# EAGLE board avoccado-avr-pcb-kane-a1-panel (EAGLE 7.2.0)
Avoccado-avr controller
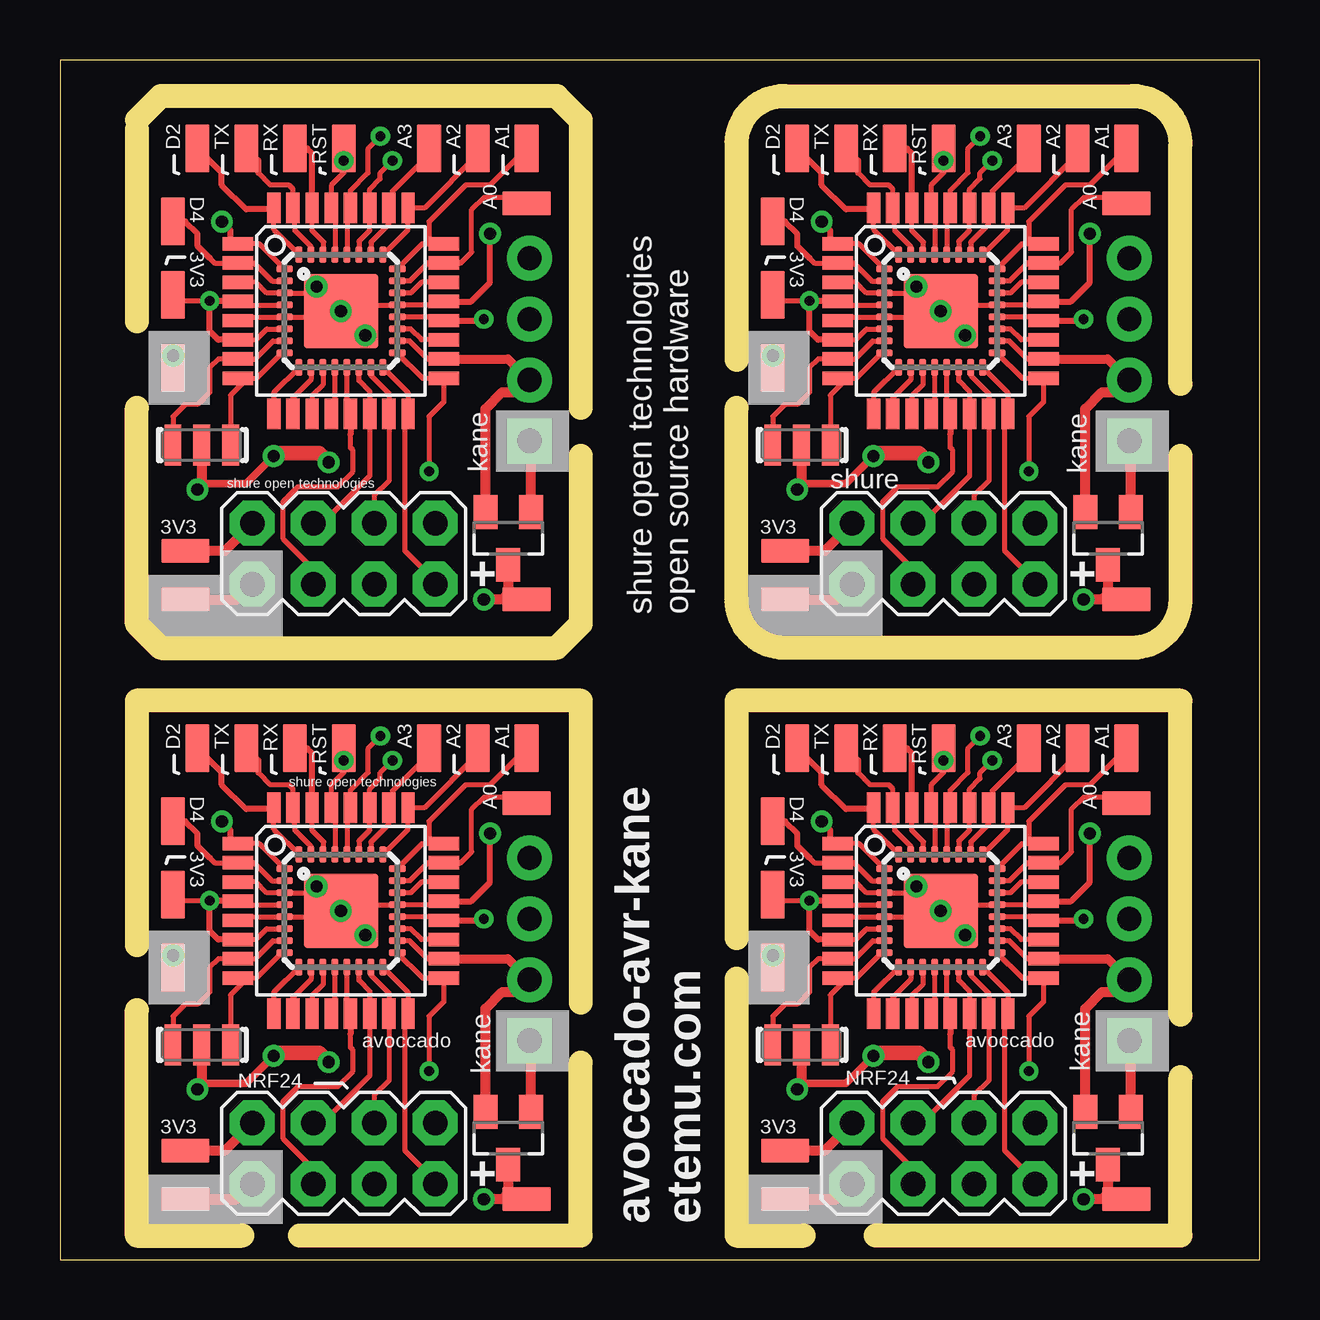
[diagram p0: board, top side]
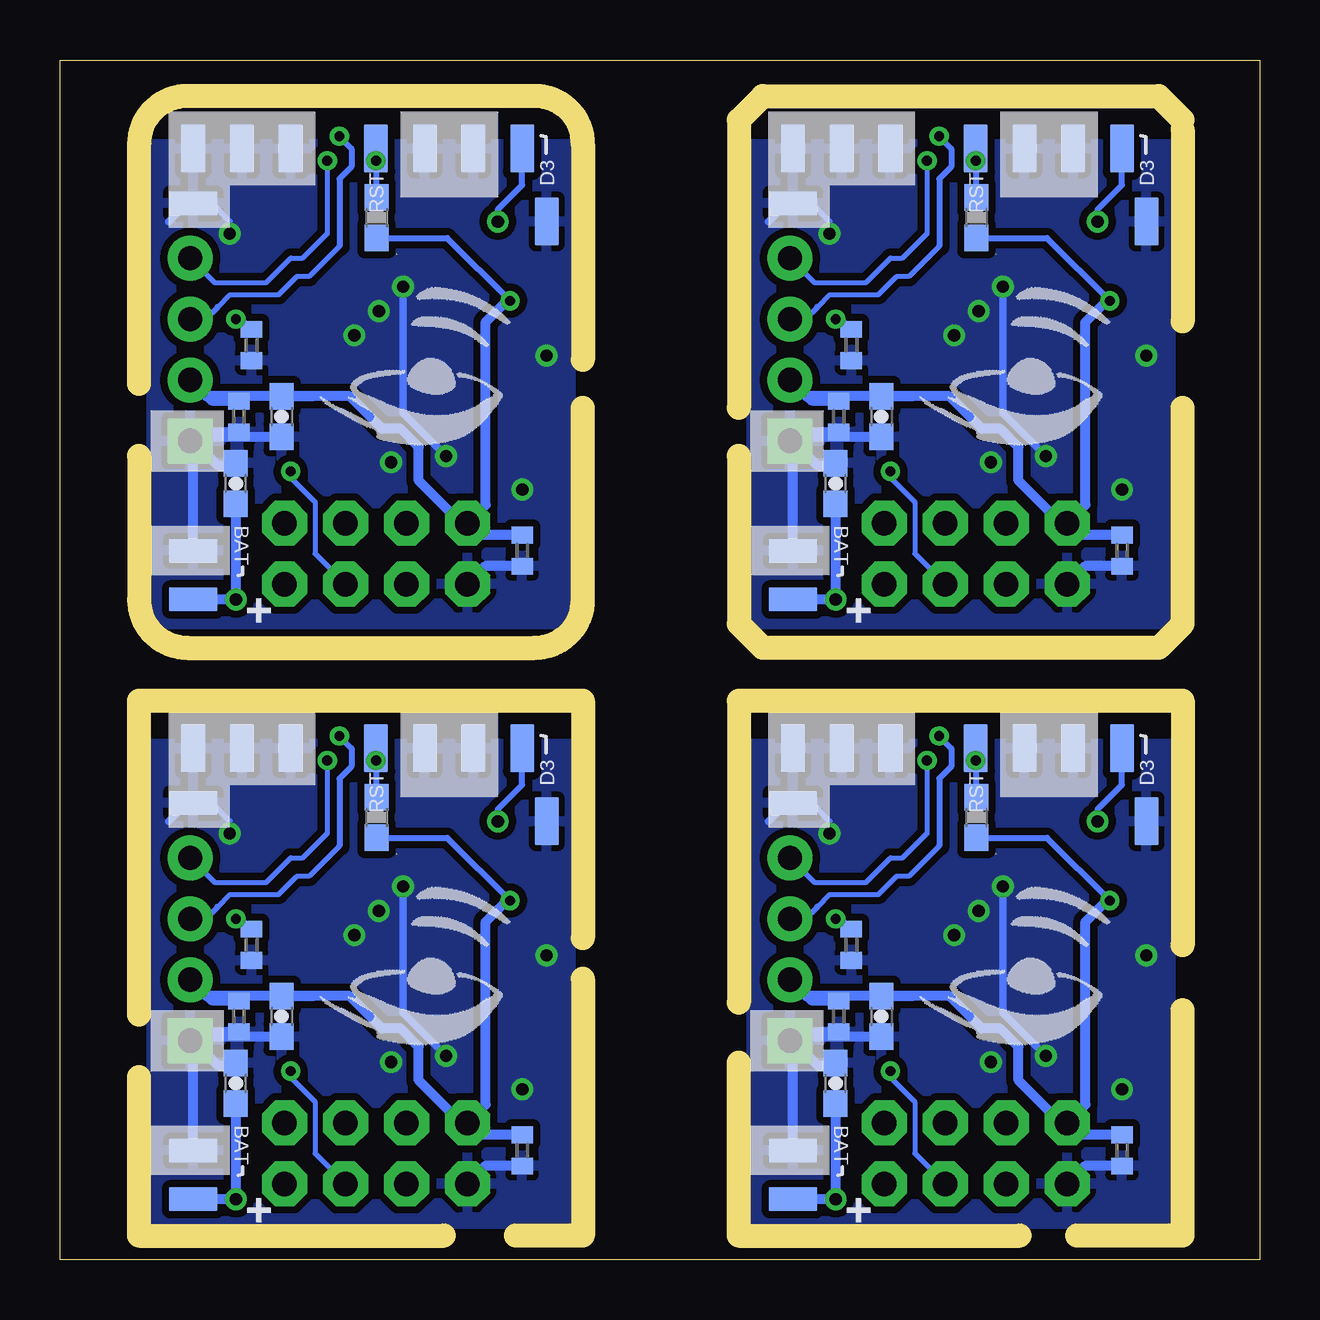
[diagram p1: board, bottom side, seen from below]

Size 50 x 50 mm. Coordinates in mm from the lower left corner, seen from the top.
Outline: 0,50 0,0 50,0 50,50 0,50
Copper layers (1*16): Top 0.035mm / dielectric 1.5mm / Bottom 0.035mm
Design rules "haka_35_l2": minimum track width 0.15mm, minimum drill 0.3mm, track to track 0.15mm, track to pad 0.15mm, pad to pad 0.15mm, via to via 0.15mm, smd to smd 0mil, copper to edge 0.2mm, drill to drill 0.2mm, minimum pad ring 0.2mm, minimum via ring 0.2mm, stop-mask expansion 0.1mm, vias tented up to drill 0mil, thermal gap 10mil
Net classes: 1 vcc: width 0.254 mm; 3 usbvcc: width 0.203 mm, drill 0.61 mm, clearance 0.152 mm
Milling: 34 lines

## Footprints (pad centres in the part's own frame; a part is rotated, then mirrored left to right if it is on the bottom)
TQFP32-08 = smd 1.27 x 0.559: 1 -4.293,2.8; 2 -4.293,2; 3 -4.293,1.2; 4 -4.293,0.4; 5 -4.293,-0.4; 6 -4.293,-1.2; 7 -4.293,-2; 8 -4.293,-2.8; 17 4.293,-2.8; 18 4.293,-2; 19 4.293,-1.2; 20 4.293,-0.4; 21 4.293,0.4; 22 4.293,1.2; 23 4.293,2; 24 4.293,2.8 | smd 0.559 x 1.27: 9 -2.8,-4.293; 10 -2,-4.293; 11 -1.2,-4.293; 12 -0.4,-4.293; 13 0.4,-4.293; 14 1.2,-4.293; 15 2,-4.293; 16 2.8,-4.293; 25 2.8,4.293; 26 2,4.293; 27 1.2,4.293; 28 0.4,4.293; 29 -0.4,4.293; 30 -1.2,4.293; 31 -2,4.293; 32 -2.8,4.293
C0402 = smd 0.7 x 0.9: 1 -0.65,0; 2 0.65,0
0603-CAP = smd 1.1 x 1: 1 -0.85,0; 2 0.85,0
MLF32 = smd 0.7 x 0.3: 1 -2.35,1.75; 2 -2.35,1.25; 3 -2.35,0.75; 4 -2.35,0.25; 5 -2.35,-0.25; 6 -2.35,-0.75; 7 -2.35,-1.25; 8 -2.35,-1.75; 17 2.35,-1.75; 18 2.35,-1.25; 19 2.35,-0.75; 20 2.35,-0.25; 21 2.35,0.25; 22 2.35,0.75; 23 2.35,1.25; 24 2.35,1.75 | smd 0.3 x 0.7: 9 -1.75,-2.35; 10 -1.25,-2.35; 11 -0.75,-2.35; 12 -0.25,-2.35; 13 0.25,-2.35; 14 0.75,-2.35; 15 1.25,-2.35; 16 1.75,-2.35; 25 1.75,2.35; 26 1.25,2.35; 27 0.75,2.35; 28 0.25,2.35; 29 -0.25,2.35; 30 -0.75,2.35; 31 -1.25,2.35; 32 -1.75,2.35 | smd 3.1 x 3.1: PAD 0,0
LUXEON-PAD = smd 2 x 1: P$1 0,0
SOT23 = smd 1 x 1.4: 1 -0.95,-1.1; 2 0.95,-1.1; 3 0,1.1
1X04_NO_SILK = drill 1.016 pad 1.88 square: 1 0,0 | drill 1.016 pad 1.88: 2 2.54,0; 3 5.08,0; 4 7.62,0
2X4 = drill 1.016 pad 1.88 octagon: 1 -3.81,-1.27; 2 -3.81,1.27; 3 -1.27,-1.27; 4 -1.27,1.27; 5 1.27,-1.27; 6 1.27,1.27; 7 3.81,-1.27; 8 3.81,1.27
RESONATOR-SMD = smd 0.7 x 1.7: 1 -1.2,0; 2 0,0; 3 1.2,0
0603-RES = smd 1.1 x 1: 1 -0.85,0; 2 0.85,0

## Placement (x,y rotation side)
AVR  ATMEGA328P  [TQFP32-08]  11.71,14.54 0 top
AVR1  ATMEGA328P  [TQFP32-08]  36.71,14.54 0 top
AVR2  ATMEGA328P  [TQFP32-08]  11.71,39.54 0 top
AVR3  ATMEGA328P  [TQFP32-08]  36.71,39.54 0 top
C1  0.1uF  [C0402]  17.01,13.12 90 bottom
C2  4.7uF  [0603-CAP]  17.67,7.34 90 bottom
C3  0.1uF  [C0402]  17.54,10.14 90 bottom
C4  0.1uF  [C0402]  30.73,4.55 270 bottom
C5  4.7uF  [0603-CAP]  15.77,10.14 270 bottom
C6  0.1uF  [C0402]  42.54,10.14 90 bottom
C7  0.1uF  [C0402]  42.01,13.12 90 bottom
C8  4.7uF  [0603-CAP]  42.67,7.34 90 bottom
C9  4.7uF  [0603-CAP]  40.77,10.14 270 bottom
C10  0.1uF  [C0402]  5.73,4.55 270 bottom
C11  0.1uF  [C0402]  5.73,29.55 270 bottom
C12  0.1uF  [C0402]  17.54,35.14 90 bottom
C13  0.1uF  [C0402]  17.01,38.12 90 bottom
C14  4.7uF  [0603-CAP]  17.67,32.34 90 bottom
C15  4.7uF  [0603-CAP]  15.77,35.14 270 bottom
C16  0.1uF  [C0402]  30.73,29.55 270 bottom
C17  0.1uF  [C0402]  42.54,35.14 90 bottom
C18  0.1uF  [C0402]  42.01,38.12 90 bottom
C19  4.7uF  [0603-CAP]  42.67,32.34 90 bottom
C20  4.7uF  [0603-CAP]  40.77,35.14 270 bottom
IC1  ATMEGA328P-20MU  [MLF32]  36.71,14.54 0 top
IC2  ATMEGA328P-20MU  [MLF32]  11.71,39.54 0 top
IC3  ATMEGA328P-20MU  [MLF32]  36.71,39.54 0 top
IC5  ATMEGA328P-20MU  [MLF32]  11.71,14.54 0 top
JP1  M01SMD  [LUXEON-PAD]  5.22,4.55 180 top
JP2  M01SMD  [LUXEON-PAD]  9.8,21.31 90 top
JP3  M01SMD  [LUXEON-PAD]  15.38,21.31 90 top
JP4  M01SMD  [LUXEON-PAD]  7.76,21.31 90 top
JP5  M01SMD  [LUXEON-PAD]  11.83,21.31 90 top
JP6  M01SMD  [LUXEON-PAD]  19.45,2.52 0 top
JP7  M01SMD  [LUXEON-PAD]  4.72,12.17 90 top
JP8  M01SMD  [LUXEON-PAD]  4.72,15.22 90 top
JP9  M01SMD  [LUXEON-PAD]  19.45,19.03 180 top
JP10  M01SMD  [LUXEON-PAD]  19.45,21.31 90 top
JP11  M01SMD  [LUXEON-PAD]  17.42,21.31 90 top
JP12  M01SMD  [LUXEON-PAD]  5.22,2.52 180 top
JP13  M01SMD  [LUXEON-PAD]  5.73,21.31 90 bottom
JP14  M01SMD  [LUXEON-PAD]  4.72,18.26 270 top
JP15  M01SMD  [LUXEON-PAD]  5.73,21.31 90 top
JP16  M01SMD  [LUXEON-PAD]  19.45,21.31 270 bottom
JP17  M01SMD  [LUXEON-PAD]  17.42,21.31 90 bottom
JP18  M01SMD  [LUXEON-PAD]  15.38,21.31 90 bottom
JP19  M01SMD  [LUXEON-PAD]  9.8,21.31 90 bottom
JP20  M01SMD  [LUXEON-PAD]  7.76,21.31 270 bottom
JP21  M01SMD  [LUXEON-PAD]  4.72,18.26 270 bottom
JP22  M01SMD  [LUXEON-PAD]  19.45,19.03 0 bottom
JP23  M01SMD  [LUXEON-PAD]  19.45,4.55 0 bottom
JP24  M01SMD  [LUXEON-PAD]  19.45,2.52 0 bottom
JP25  M01SMD  [LUXEON-PAD]  11.83,21.31 270 bottom
JP26  M01SMD  [LUXEON-PAD]  30.22,4.55 180 top
JP27  M01SMD  [LUXEON-PAD]  34.8,21.31 90 top
JP28  M01SMD  [LUXEON-PAD]  32.76,21.31 90 top
JP29  M01SMD  [LUXEON-PAD]  36.83,21.31 90 top
JP30  M01SMD  [LUXEON-PAD]  44.45,2.52 0 top
JP31  M01SMD  [LUXEON-PAD]  29.72,12.17 90 top
JP32  M01SMD  [LUXEON-PAD]  29.72,15.22 90 top
JP33  M01SMD  [LUXEON-PAD]  44.45,19.03 180 top
JP34  M01SMD  [LUXEON-PAD]  44.45,21.31 90 top
JP35  M01SMD  [LUXEON-PAD]  40.38,21.31 90 top
JP36  M01SMD  [LUXEON-PAD]  42.42,21.31 90 top
JP37  M01SMD  [LUXEON-PAD]  30.22,2.52 180 top
JP38  M01SMD  [LUXEON-PAD]  30.73,21.31 90 bottom
JP39  M01SMD  [LUXEON-PAD]  29.72,18.26 270 top
JP40  M01SMD  [LUXEON-PAD]  30.73,21.31 90 top
JP41  M01SMD  [LUXEON-PAD]  44.45,21.31 270 bottom
JP42  M01SMD  [LUXEON-PAD]  42.42,21.31 90 bottom
JP43  M01SMD  [LUXEON-PAD]  40.38,21.31 90 bottom
JP44  M01SMD  [LUXEON-PAD]  34.8,21.31 90 bottom
JP45  M01SMD  [LUXEON-PAD]  32.76,21.31 270 bottom
JP46  M01SMD  [LUXEON-PAD]  29.72,18.26 270 bottom
JP47  M01SMD  [LUXEON-PAD]  44.45,19.03 0 bottom
JP48  M01SMD  [LUXEON-PAD]  44.45,4.55 0 bottom
JP49  M01SMD  [LUXEON-PAD]  44.45,2.52 0 bottom
JP50  M01SMD  [LUXEON-PAD]  36.83,21.31 270 bottom
JP51  M01SMD  [LUXEON-PAD]  5.22,29.55 180 top
JP52  M01SMD  [LUXEON-PAD]  9.8,46.31 90 top
JP53  M01SMD  [LUXEON-PAD]  7.76,46.31 90 top
JP54  M01SMD  [LUXEON-PAD]  11.83,46.31 90 top
JP55  M01SMD  [LUXEON-PAD]  19.45,27.52 0 top
JP56  M01SMD  [LUXEON-PAD]  4.72,37.17 90 top
JP57  M01SMD  [LUXEON-PAD]  4.72,40.22 90 top
JP58  M01SMD  [LUXEON-PAD]  19.45,44.03 180 top
JP59  M01SMD  [LUXEON-PAD]  19.45,46.31 90 top
JP60  M01SMD  [LUXEON-PAD]  15.38,46.31 90 top
JP61  M01SMD  [LUXEON-PAD]  17.42,46.31 90 top
JP62  M01SMD  [LUXEON-PAD]  5.22,27.52 180 top
JP63  M01SMD  [LUXEON-PAD]  5.73,46.31 90 bottom
JP64  M01SMD  [LUXEON-PAD]  4.72,43.26 270 top
JP65  M01SMD  [LUXEON-PAD]  5.73,46.31 90 top
JP66  M01SMD  [LUXEON-PAD]  19.45,46.31 270 bottom
JP67  M01SMD  [LUXEON-PAD]  17.42,46.31 90 bottom
JP68  M01SMD  [LUXEON-PAD]  15.38,46.31 90 bottom
JP69  M01SMD  [LUXEON-PAD]  9.8,46.31 90 bottom
JP70  M01SMD  [LUXEON-PAD]  7.76,46.31 270 bottom
JP71  M01SMD  [LUXEON-PAD]  4.72,43.26 270 bottom
JP72  M01SMD  [LUXEON-PAD]  19.45,44.03 0 bottom
JP73  M01SMD  [LUXEON-PAD]  19.45,29.55 0 bottom
JP74  M01SMD  [LUXEON-PAD]  19.45,27.52 0 bottom
JP75  M01SMD  [LUXEON-PAD]  11.83,46.31 270 bottom
JP76  M01SMD  [LUXEON-PAD]  30.22,29.55 180 top
JP77  M01SMD  [LUXEON-PAD]  34.8,46.31 90 top
JP78  M01SMD  [LUXEON-PAD]  32.76,46.31 90 top
JP79  M01SMD  [LUXEON-PAD]  36.83,46.31 90 top
JP80  M01SMD  [LUXEON-PAD]  44.45,27.52 0 top
JP81  M01SMD  [LUXEON-PAD]  29.72,37.17 90 top
JP82  M01SMD  [LUXEON-PAD]  29.72,40.22 90 top
JP83  M01SMD  [LUXEON-PAD]  44.45,44.03 180 top
JP84  M01SMD  [LUXEON-PAD]  44.45,46.31 90 top
JP85  M01SMD  [LUXEON-PAD]  40.38,46.31 90 top
JP86  M01SMD  [LUXEON-PAD]  42.42,46.31 90 top
JP87  M01SMD  [LUXEON-PAD]  30.22,27.52 180 top
JP88  M01SMD  [LUXEON-PAD]  30.73,46.31 90 bottom
JP89  M01SMD  [LUXEON-PAD]  29.72,43.26 270 top
JP90  M01SMD  [LUXEON-PAD]  30.73,46.31 90 top
JP91  M01SMD  [LUXEON-PAD]  44.45,46.31 270 bottom
JP92  M01SMD  [LUXEON-PAD]  42.42,46.31 90 bottom
JP93  M01SMD  [LUXEON-PAD]  40.38,46.31 90 bottom
JP94  M01SMD  [LUXEON-PAD]  34.8,46.31 90 bottom
JP95  M01SMD  [LUXEON-PAD]  32.76,46.31 270 bottom
JP96  M01SMD  [LUXEON-PAD]  29.72,43.26 270 bottom
JP97  M01SMD  [LUXEON-PAD]  44.45,44.03 0 bottom
JP98  M01SMD  [LUXEON-PAD]  44.45,29.55 0 bottom
JP99  M01SMD  [LUXEON-PAD]  44.45,27.52 0 bottom
JP100  M01SMD  [LUXEON-PAD]  36.83,46.31 270 bottom
LDO1  MCP1703CB  [SOT23]  18.69,5.06 180 top
LDO2  MCP1703CB  [SOT23]  43.69,5.06 180 top
LDO3  MCP1703CB  [SOT23]  18.69,30.06 180 top
LDO4  MCP1703CB  [SOT23]  43.69,30.06 180 top
MPU1  [1X04_NO_SILK]  44.58,9.12 90 top
MPU2  [1X04_NO_SILK]  19.57,34.12 90 top
MPU3  [1X04_NO_SILK]  44.58,34.12 90 top
MPU6050  [1X04_NO_SILK]  19.57,9.12 90 top
NRF1  M04X2  [2X4]  36.83,4.42 0 top
NRF2  M04X2  [2X4]  11.83,29.42 0 top
NRF3  M04X2  [2X4]  36.83,29.42 0 top
NRF24  M04X2  [2X4]  11.83,4.42 0 top
Q1  16MHz  [RESONATOR-SMD]  5.91,8.95 180 top
Q2  16MHz  [RESONATOR-SMD]  30.91,8.95 180 top
Q3  16MHz  [RESONATOR-SMD]  5.91,33.95 180 top
Q4  16MHz  [RESONATOR-SMD]  30.91,33.95 180 top
R1  10K  [0603-RES]  36.8,18.43 270 bottom
R2  10K  [0603-RES]  11.8,18.43 270 bottom
R3  10K  [0603-RES]  11.8,43.43 270 bottom
R4  10K  [0603-RES]  36.8,43.43 270 bottom

## Library data of the parts
AVR AVR1-AVR3 = SparkFun-DigitalIC; PROD_ID: IC-09069
C1 C3 C4 C6 C7 C10-C13 C16-C18 Q1-Q4 = SparkFun
C2 C5 C8 C9 C14 C15 C19 C20 = SparkFun-Capacitors; PROD_ID: CAP-08280
IC1-IC3 IC5 = idii
JP1-JP100 MPU1-MPU3 MPU6050 NRF1-NRF3 NRF24 = SparkFun-Connectors
LDO1-LDO4 = linear
R1-R4 = SparkFun-Resistors

## Nets
3V1: AVR1.4 AVR1.6 AVR1.18 C4.1 C6.2 C9.1 IC1.4 IC1.6 IC1.18 JP26.P$1 JP32.P$1 LDO2.2 MPU1.2 NRF1.2 R1.2
3V2: AVR2.4 AVR2.6 AVR2.18 C11.1 C12.2 C15.1 IC2.4 IC2.6 IC2.18 JP51.P$1 JP57.P$1 LDO3.2 MPU2.2 NRF2.2 R3.2
3V3: AVR.4 AVR.6 AVR.18 C3.2 C5.1 C10.1 IC5.4 IC5.6 IC5.18 JP1.P$1 JP8.P$1 LDO1.2 MPU6050.2 NRF24.2 R2.2
3V4: AVR3.4 AVR3.6 AVR3.18 C16.1 C17.2 C20.1 IC3.4 IC3.6 IC3.18 JP76.P$1 JP82.P$1 LDO4.2 MPU3.2 NRF3.2 R4.2
A0: AVR.23 IC5.23 JP9.P$1
A1: AVR.24 IC5.24 JP10.P$1
A2: AVR.25 IC5.25 JP11.P$1
A3: AVR.26 IC5.26 JP3.P$1
A4: AVR.27 IC5.27 MPU6050.4
A5: AVR.28 IC5.28 MPU6050.3
A6: AVR.19 IC5.19
A7: AVR.22 IC5.22
A8: AVR1.28 IC1.28 MPU1.3
A9: AVR1.27 IC1.27 MPU1.4
A10: AVR1.26 IC1.26 JP35.P$1
A11: AVR1.25 IC1.25 JP36.P$1
A12: AVR1.24 IC1.24 JP34.P$1
A13: AVR1.23 IC1.23 JP33.P$1
A14: AVR1.19 IC1.19
A15: AVR1.22 IC1.22
A16: AVR2.28 IC2.28 MPU2.3
A17: AVR2.27 IC2.27 MPU2.4
A18: AVR2.26 IC2.26 JP60.P$1
A19: AVR2.25 IC2.25 JP61.P$1
A20: AVR2.24 IC2.24 JP59.P$1
A21: AVR2.23 IC2.23 JP58.P$1
A22: AVR2.19 IC2.19
A23: AVR2.22 IC2.22
A24: AVR3.28 IC3.28 MPU3.3
A25: AVR3.27 IC3.27 MPU3.4
A26: AVR3.26 IC3.26 JP85.P$1
A27: AVR3.25 IC3.25 JP86.P$1
A28: AVR3.24 IC3.24 JP84.P$1
A29: AVR3.23 IC3.23 JP83.P$1
A30: AVR3.19 IC3.19
A31: AVR3.22 IC3.22
AREF: AVR.20 C1.2 IC5.20
AREF1: AVR1.20 C7.2 IC1.20
AREF2: AVR2.20 C13.2 IC2.20
AREF3: AVR3.20 C18.2 IC3.20
D1: AVR1.13 IC1.13 NRF1.3
D2: AVR.32 IC5.32 JP15.P$1
D3: AVR.1 IC5.1 JP13.P$1
D4: AVR.2 IC5.2 JP14.P$1
D5: AVR.9 IC5.9
D6: AVR.10 IC5.10
D7: AVR.11 IC5.11
D8: AVR.12 IC5.12
D9: AVR.13 IC5.13 NRF24.3
D10: AVR.14 IC5.14 NRF24.4
D11: AVR1.12 IC1.12
D12: AVR1.32 IC1.32 JP40.P$1
D13: AVR1.1 IC1.1 JP38.P$1
D14: AVR1.2 IC1.2 JP39.P$1
D15: AVR1.9 IC1.9
D16: AVR1.10 IC1.10
D17: AVR1.11 IC1.11
D18: AVR1.14 IC1.14 NRF1.4
D19: AVR2.13 IC2.13 NRF2.3
D20: AVR2.12 IC2.12
D21: AVR2.32 IC2.32 JP65.P$1
D22: AVR2.1 IC2.1 JP63.P$1
D23: AVR2.2 IC2.2 JP64.P$1
D24: AVR2.9 IC2.9
D25: AVR2.10 IC2.10
D26: AVR2.11 IC2.11
D27: AVR2.14 IC2.14 NRF2.4
D28: AVR3.13 IC3.13 NRF3.3
D29: AVR3.12 IC3.12
D30: AVR3.32 IC3.32 JP90.P$1
D31: AVR3.1 IC3.1 JP88.P$1
D32: AVR3.2 IC3.2 JP89.P$1
D33: AVR3.9 IC3.9
D34: AVR3.10 IC3.10
D35: AVR3.11 IC3.11
D36: AVR3.14 IC3.14 NRF3.4
GND [vcc]: AVR.3 AVR.5 AVR.21 C1.1 C2.2 C3.1 C5.2 C10.2 IC5.3 IC5.5 IC5.21 JP7.P$1 JP12.P$1 JP16.P$1 JP17.P$1 JP18.P$1 JP19.P$1 JP20.P$1 JP21.P$1 JP22.P$1 JP23.P$1 LDO1.1 MPU6050.1 NRF24.1 Q1.2
GND1 [vcc]: AVR1.3 AVR1.5 AVR1.21 C4.2 C6.1 C7.1 C8.2 C9.2 IC1.3 IC1.5 IC1.21 JP31.P$1 JP37.P$1 JP41.P$1 JP42.P$1 JP43.P$1 JP44.P$1 JP45.P$1 JP46.P$1 JP47.P$1 JP48.P$1 LDO2.1 MPU1.1 NRF1.1 Q2.2
GND2 [vcc]: AVR2.3 AVR2.5 AVR2.21 C11.2 C12.1 C13.1 C14.2 C15.2 IC2.3 IC2.5 IC2.21 JP56.P$1 JP62.P$1 JP66.P$1 JP67.P$1 JP68.P$1 JP69.P$1 JP70.P$1 JP71.P$1 JP72.P$1 JP73.P$1 LDO3.1 MPU2.1 NRF2.1 Q3.2
GND3 [vcc]: AVR3.3 AVR3.5 AVR3.21 C16.2 C17.1 C18.1 C19.2 C20.2 IC3.3 IC3.5 IC3.21 JP81.P$1 JP87.P$1 JP91.P$1 JP92.P$1 JP93.P$1 JP94.P$1 JP95.P$1 JP96.P$1 JP97.P$1 JP98.P$1 LDO4.1 MPU3.1 NRF3.1 Q4.2
MISO: AVR.16 IC5.16 NRF24.7
MISO1: AVR1.16 IC1.16 NRF1.7
MISO2: AVR2.16 IC2.16 NRF2.7
MISO3: AVR3.16 IC3.16 NRF3.7
MOSI: AVR.15 IC5.15 NRF24.6
MOSI1: AVR1.15 IC1.15 NRF1.6
MOSI2: AVR2.15 IC2.15 NRF2.6
MOSI3: AVR3.15 IC3.15 NRF3.6
N$1: AVR.8 IC5.8 Q1.1
N$2: AVR.7 IC5.7 Q1.3
N$3: AVR1.8 IC1.8 Q2.1
N$4: AVR1.7 IC1.7 Q2.3
N$5: AVR2.8 IC2.8 Q3.1
N$6: AVR2.7 IC2.7 Q3.3
N$7: AVR3.8 IC3.8 Q4.1
N$8: AVR3.7 IC3.7 Q4.3
RESET: AVR.29 IC5.29 JP5.P$1 JP25.P$1 R2.1
RESET1: AVR1.29 IC1.29 JP29.P$1 JP50.P$1 R1.1
RESET2: AVR2.29 IC2.29 JP54.P$1 JP75.P$1 R3.1
RESET3: AVR3.29 IC3.29 JP79.P$1 JP100.P$1 R4.1
RXI: AVR.30 IC5.30 JP2.P$1
RXI1: AVR1.30 IC1.30 JP27.P$1
RXI2: AVR2.30 IC2.30 JP52.P$1
RXI3: AVR3.30 IC3.30 JP77.P$1
SCK: AVR.17 IC5.17 NRF24.5
SCK1: AVR1.17 IC1.17 NRF1.5
SCK2: AVR2.17 IC2.17 NRF2.5
SCK3: AVR3.17 IC3.17 NRF3.5
TXO: AVR.31 IC5.31 JP4.P$1
TXO1: AVR1.31 IC1.31 JP28.P$1
TXO2: AVR2.31 IC2.31 JP53.P$1
TXO3: AVR3.31 IC3.31 JP78.P$1
VBAT [vcc]: C2.1 JP6.P$1 JP24.P$1 LDO1.3
VBAT1 [vcc]: C8.1 JP30.P$1 JP49.P$1 LDO2.3
VBAT2 [vcc]: C14.1 JP55.P$1 JP74.P$1 LDO3.3
VBAT3 [vcc]: C19.1 JP80.P$1 JP99.P$1 LDO4.3

## Tracks (layer width: path | path; a pad name or v marks a point on that pad's centre or on a via)
3V1  (via drill 0.41)
  Top 0.203: AVR1.18 40.33,12.54 39.58,13.29 IC1.18 | AVR1.4 32.57,14.79 IC1.4 | AVR1.6 33.17,13.34 33.62,13.79 IC1.6 | JP32.P$1 29.97,14.96 v31.24,14.96
  Top 0.254: 32.4,14.9 32.4,14.92 AVR1.4 32.39,14.96 v31.24,14.96 31.24,13.69 31.59,13.34 AVR1.6
  Top 0.381: AVR1.18 43.67,12.54 MPU1.2
  Top 0.406: LDO2.2 42.74,10.46 43.43,11.15 44.07,11.15 MPU1.2 | JP26.P$1 31.88,4.55 NRF1.2
  Bottom 0.254: R1.2 33.86,17.58 v31.24,14.96
  Bottom 0.381: 42.41,10.79 C6.2 43.68,10.79 MPU1.2
  Bottom 0.406: C4.1 32.52,5.2 NRF1.2 | C9.1 43.9,10.99 MPU1.2 | C9.1 39.46,10.99 | NRF1.2 33.27,5.69 35.05,7.47 35.05,8.87 35.81,9.63 36.57,9.63 37.93,10.99 C9.1 | NRF1.2 32.26,6.45 32.26,14.07 31.37,14.96 v31.24,14.96
3V2  (via drill 0.41)
  Top 0.203: AVR2.18 15.33,37.54 14.58,38.29 IC2.18 | AVR2.4 7.57,39.79 IC2.4 | AVR2.6 8.18,38.34 8.62,38.79 IC2.6 | JP57.P$1 4.97,39.96 v6.24,39.96
  Top 0.254: 7.4,39.9 7.4,39.92 AVR2.4 7.39,39.96 v6.24,39.96 6.24,38.69 6.59,38.34 AVR2.6
  Top 0.381: AVR2.18 18.67,37.54 MPU2.2
  Top 0.406: LDO3.2 17.74,35.46 18.43,36.15 19.07,36.15 MPU2.2 | JP51.P$1 6.88,29.55 NRF2.2
  Bottom 0.254: R3.2 8.86,42.58 v6.24,39.96
  Bottom 0.381: 17.41,35.79 C12.2 18.68,35.79 MPU2.2
  Bottom 0.406: C11.1 7.53,30.2 NRF2.2 | C15.1 18.9,35.99 MPU2.2 | C15.1 14.46,35.99 | NRF2.2 8.27,30.69 10.05,32.47 10.05,33.87 10.81,34.63 11.57,34.63 12.93,35.99 C15.1 | NRF2.2 7.26,31.45 7.26,39.07 6.37,39.96 v6.24,39.96
3V3  (via drill 0.41)
  Top 0.203: AVR.18 15.33,12.54 14.58,13.29 IC5.18 | AVR.4 7.57,14.79 IC5.4 | AVR.6 8.18,13.34 8.62,13.79 IC5.6 | JP8.P$1 4.97,14.96 v6.24,14.96
  Top 0.254: 7.4,14.9 7.4,14.92 AVR.4 7.39,14.96 v6.24,14.96 6.24,13.69 6.59,13.34 AVR.6
  Top 0.381: AVR.18 18.67,12.54 MPU6050.2
  Top 0.406: LDO1.2 17.74,10.46 18.43,11.15 19.07,11.15 MPU6050.2 | JP1.P$1 6.88,4.55 NRF24.2
  Bottom 0.254: R2.2 8.86,17.58 v6.24,14.96
  Bottom 0.381: 17.41,10.79 C3.2 18.68,10.79 MPU6050.2
  Bottom 0.406: C10.1 7.53,5.2 NRF24.2 | C5.1 18.9,10.99 MPU6050.2 | C5.1 14.46,10.99 | NRF24.2 8.27,5.69 10.05,7.47 10.05,8.87 10.81,9.63 11.57,9.63 12.93,10.99 C5.1 | NRF24.2 7.26,6.45 7.26,14.07 6.37,14.96 v6.24,14.96
3V4  (via drill 0.41)
  Top 0.203: AVR3.18 40.33,37.54 39.58,38.29 IC3.18 | AVR3.4 32.57,39.79 IC3.4 | AVR3.6 33.17,38.34 33.62,38.79 IC3.6 | JP82.P$1 29.97,39.96 v31.24,39.96
  Top 0.254: 32.4,39.9 32.4,39.92 AVR3.4 32.39,39.96 v31.24,39.96 31.24,38.69 31.59,38.34 AVR3.6
  Top 0.381: AVR3.18 43.67,37.54 MPU3.2
  Top 0.406: LDO4.2 42.74,35.46 43.43,36.15 44.07,36.15 MPU3.2 | JP76.P$1 31.88,29.55 NRF3.2
  Bottom 0.254: R4.2 33.86,42.58 v31.24,39.96
  Bottom 0.381: 42.41,35.79 C17.2 43.68,35.79 MPU3.2
  Bottom 0.406: C16.1 32.52,30.2 NRF3.2 | C20.1 43.9,35.99 MPU3.2 | C20.1 39.46,35.99 | NRF3.2 33.27,30.69 35.05,32.47 35.05,33.87 35.81,34.63 36.57,34.63 37.93,35.99 C20.1 | NRF3.2 32.26,31.45 32.26,39.07 31.37,39.96 v31.24,39.96
A0
  Top 0.203: IC5.23 14.58,15.79 15.33,16.54 AVR.23 16.7,16.54 17.16,16.99 17.16,18.77 17.67,19.28 18.94,19.28 19.19,19.03 JP9.P$1
A1
  Top 0.203: 15.38,17.34 15.11,17.34 IC5.24 | 15.38,17.34 AVR.24 16.49,17.34 | JP10.P$1 17.92,19.79 16.91,19.79 15.38,18.26 15.38,17.34
A2
  Top 0.203: IC5.25 14.51,17.94 AVR.25 15.19,18.83 17.42,21.06 JP11.P$1
A3
  Top 0.203: IC5.26 12.96,17.4 13.71,18.15 AVR.26 13.86,18.98 13.86,19.53 15.38,21.06 JP3.P$1
A4  (via drill 0.41)
  Top 0.203: IC5.27 12.46,17.44 12.91,17.89 AVR.27 12.91,19.6 13.35,20.04 13.35,20.3 v13.86,20.8
  Bottom 0.203: v13.86,20.8 13.86,17.76 14.88,16.74 15.38,16.74 16.4,15.72 18.56,15.72 MPU6050.4
A5  (via drill 0.41)
  Top 0.203: IC5.28 11.96,18.68 AVR.28 12.11,19.56 12.84,20.3 12.84,21.31 v13.35,21.82
  Bottom 0.203: 13.35,17.25 14.62,15.98 15.13,15.98 15.89,15.22 17.92,15.22 18.43,14.71
  Bottom 0.254: v13.35,21.82 12.84,21.31 12.84,20.55 13.35,20.04 13.35,17.25 | 18.43,14.71 18.94,14.2 MPU6050.3
A6
  Top 0.203: AVR.19 15.06,13.34 14.62,13.79 IC5.19
A7
  Top 0.203: AVR.22 15.06,15.74 14.62,15.29 IC5.22
A8  (via drill 0.41)
  Top 0.203: IC1.28 36.96,18.68 AVR1.28 37.11,19.56 37.84,20.3 37.84,21.31 v38.35,21.82
  Bottom 0.203: 38.35,17.25 39.62,15.98 40.13,15.98 40.89,15.22 42.92,15.22 43.43,14.71
  Bottom 0.254: v38.35,21.82 37.84,21.31 37.84,20.55 38.35,20.04 38.35,17.25 | 43.43,14.71 43.94,14.2 MPU1.3
A9  (via drill 0.41)
  Top 0.203: IC1.27 37.46,17.44 37.91,17.89 AVR1.27 37.91,19.6 38.35,20.04 38.35,20.3 v38.86,20.8
  Bottom 0.203: v38.86,20.8 38.86,17.76 39.88,16.74 40.38,16.74 41.4,15.72 43.56,15.72 MPU1.4
A10
  Top 0.203: IC1.26 37.96,17.4 38.71,18.15 AVR1.26 38.86,18.98 38.86,19.53 40.38,21.06 JP35.P$1
A11
  Top 0.203: IC1.25 39.51,17.94 AVR1.25 40.19,18.83 42.42,21.06 JP36.P$1
A12
  Top 0.203: 40.38,17.34 40.11,17.34 IC1.24 | 40.38,17.34 AVR1.24 41.49,17.34 | JP34.P$1 42.92,19.79 41.91,19.79 40.38,18.26 40.38,17.34
A13
  Top 0.203: IC1.23 39.58,15.79 40.33,16.54 AVR1.23 41.7,16.54 42.16,16.99 42.16,18.77 42.67,19.28 43.94,19.28 44.19,19.03 JP33.P$1
A14
  Top 0.203: AVR1.19 40.06,13.34 39.62,13.79 IC1.19
A15
  Top 0.203: AVR1.22 40.06,15.74 39.62,15.29 IC1.22
A16  (via drill 0.41)
  Top 0.203: IC2.28 11.96,43.68 AVR2.28 12.11,44.56 12.84,45.3 12.84,46.31 v13.35,46.82
  Bottom 0.203: 13.35,42.25 14.62,40.98 15.13,40.98 15.89,40.22 17.92,40.22 18.43,39.71
  Bottom 0.254: v13.35,46.82 12.84,46.31 12.84,45.55 13.35,45.04 13.35,42.25 | 18.43,39.71 18.94,39.2 MPU2.3
A17  (via drill 0.41)
  Top 0.203: IC2.27 12.46,42.44 12.91,42.89 AVR2.27 12.91,44.6 13.35,45.04 13.35,45.3 v13.86,45.8
  Bottom 0.203: v13.86,45.8 13.86,42.76 14.88,41.74 15.38,41.74 16.4,40.72 18.56,40.72 MPU2.4
A18
  Top 0.203: IC2.26 12.96,42.4 13.71,43.15 AVR2.26 13.86,43.98 13.86,44.53 15.38,46.06 JP60.P$1
A19
  Top 0.203: IC2.25 14.51,42.94 AVR2.25 15.19,43.83 17.42,46.06 JP61.P$1
A20
  Top 0.203: 15.38,42.34 15.11,42.34 IC2.24 | 15.38,42.34 AVR2.24 16.49,42.34 | JP59.P$1 17.92,44.79 16.91,44.79 15.38,43.26 15.38,42.34
A21
  Top 0.203: IC2.23 14.58,40.79 15.33,41.54 AVR2.23 16.7,41.54 17.16,41.99 17.16,43.77 17.67,44.28 18.94,44.28 19.19,44.03 JP58.P$1
A22
  Top 0.203: AVR2.19 15.06,38.34 14.62,38.79 IC2.19
A23
  Top 0.203: AVR2.22 15.06,40.74 14.62,40.29 IC2.22
A24  (via drill 0.41)
  Top 0.203: IC3.28 36.96,43.68 AVR3.28 37.11,44.56 37.84,45.3 37.84,46.31 v38.35,46.82
  Bottom 0.203: 38.35,42.25 39.62,40.98 40.13,40.98 40.89,40.22 42.92,40.22 43.43,39.71
  Bottom 0.254: v38.35,46.82 37.84,46.31 37.84,45.55 38.35,45.04 38.35,42.25 | 43.43,39.71 43.94,39.2 MPU3.3
A25  (via drill 0.41)
  Top 0.203: IC3.27 37.46,42.44 37.91,42.89 AVR3.27 37.91,44.6 38.35,45.04 38.35,45.3 v38.86,45.8
  Bottom 0.203: v38.86,45.8 38.86,42.76 39.88,41.74 40.38,41.74 41.4,40.72 43.56,40.72 MPU3.4
A26
  Top 0.203: IC3.26 37.96,42.4 38.71,43.15 AVR3.26 38.86,43.98 38.86,44.53 40.38,46.06 JP85.P$1
A27
  Top 0.203: IC3.25 39.51,42.94 AVR3.25 40.19,43.83 42.42,46.06 JP86.P$1
A28
  Top 0.203: 40.38,42.34 40.11,42.34 IC3.24 | 40.38,42.34 AVR3.24 41.49,42.34 | JP84.P$1 42.92,44.79 41.91,44.79 40.38,43.26 40.38,42.34
A29
  Top 0.203: IC3.23 39.58,40.79 40.33,41.54 AVR3.23 41.7,41.54 42.16,41.99 42.16,43.77 42.67,44.28 43.94,44.28 44.19,44.03 JP83.P$1
A30
  Top 0.203: AVR3.19 40.06,38.34 39.62,38.79 IC3.19
A31
  Top 0.203: AVR3.22 40.06,40.74 39.62,40.29 IC3.22
AREF  (via drill 0.41)
  Top 0.203: AVR.20 15.85,14.29 IC5.20
  Top 0.254: AVR.20 17.61,14.14 v17.67,14.2
  Bottom 0.254: v17.67,14.2 17.45,14.2 C1.2
AREF1  (via drill 0.41)
  Top 0.203: AVR1.20 40.85,14.29 IC1.20
  Top 0.254: AVR1.20 42.61,14.14 v42.67,14.2
  Bottom 0.254: v42.67,14.2 42.45,14.2 C7.2
AREF2  (via drill 0.41)
  Top 0.203: AVR2.20 15.85,39.29 IC2.20
  Top 0.254: AVR2.20 17.61,39.14 v17.67,39.2
  Bottom 0.254: v17.67,39.2 17.45,39.2 C13.2
AREF3  (via drill 0.41)
  Top 0.203: AVR3.20 40.85,39.29 IC3.20
  Top 0.254: AVR3.20 42.61,39.14 v42.67,39.2
  Bottom 0.254: v42.67,39.2 42.45,39.2 C18.2
D1
  Top 0.203: IC1.13 36.96,10.39 AVR1.13 37.11,8.84 37.21,8.74 37.21,7.85 36.57,7.21 34.92,7.21 34.29,6.58 34.29,5.06 35.81,3.53 35.81,3.4 NRF1.3
  Top 0.254: AVR1.13 37.11,9.4
D2
  Top 0.203: AVR.32 8.91,17.94 IC5.32
  Top 0.254: AVR.32 8.85,18.77 7.76,18.77 6.75,19.79 6.75,20.3 JP15.P$1
D3  (via drill 0.51)
  Top 0.203: AVR.1 8.31,17.34 IC5.1
  Top 0.254: AVR.1 7.11,17.34 7.11,17.9 v6.75,18.26
  Bottom 0.254: v6.75,18.26 6.75,18.77 5.73,19.79 JP13.P$1
D4
  Top 0.203: IC5.2 8.84,15.79 8.09,16.54 AVR.2 6.44,16.54 6.24,16.74
  Top 0.254: 6.24,16.74 5.73,17.25 5.73,17.76 5.22,18.26 JP14.P$1
D5
  Top 0.203: AVR.9 8.91,11.14 IC5.9
D6
  Top 0.203: AVR.10 9.71,10.92 10.46,11.67 IC5.10
D7
  Top 0.203: AVR.11 10.51,11 10.96,11.45 IC5.11
D8
  Top 0.203: AVR.12 11.46,10.39 IC5.12
D9
  Top 0.203: IC5.13 11.96,10.39 AVR.13 12.11,8.84 12.21,8.74 12.21,7.85 11.57,7.21 9.92,7.21 9.29,6.58 9.29,5.06 10.81,3.53 10.81,3.4 NRF24.3
  Top 0.254: AVR.13 12.11,9.4
D10
  Top 0.203: IC5.14 12.46,11.63 12.91,11.18 AVR.14 12.91,7.66 11.32,6.07 10.94,6.07 NRF24.4
D11
  Top 0.203: AVR1.12 36.46,10.39 IC1.12
D12
  Top 0.203: AVR1.32 33.91,17.94 IC1.32
  Top 0.254: AVR1.32 33.85,18.77 32.76,18.77 31.75,19.79 31.75,20.3 JP40.P$1
D13  (via drill 0.51)
  Top 0.203: AVR1.1 33.31,17.34 IC1.1
  Top 0.254: AVR1.1 32.11,17.34 32.11,17.9 v31.75,18.26
  Bottom 0.254: v31.75,18.26 31.75,18.77 30.73,19.79 JP38.P$1
D14
  Top 0.203: IC1.2 33.84,15.79 33.09,16.54 AVR1.2 31.44,16.54 31.24,16.74
  Top 0.254: 31.24,16.74 30.73,17.25 30.73,17.76 30.22,18.26 JP39.P$1
D15
  Top 0.203: AVR1.9 33.91,11.14 IC1.9
D16
  Top 0.203: AVR1.10 34.71,10.92 35.46,11.67 IC1.10
D17
  Top 0.203: AVR1.11 35.51,11 35.96,11.45 IC1.11
D18
  Top 0.203: IC1.14 37.46,11.63 37.91,11.18 AVR1.14 37.91,7.66 36.32,6.07 35.94,6.07 NRF1.4
D19
  Top 0.203: IC2.13 11.96,35.4 AVR2.13 12.11,33.84 12.21,33.74 12.21,32.85 11.57,32.22 9.92,32.22 9.29,31.58 9.29,30.06 10.81,28.53 10.81,28.41 NRF2.3
  Top 0.254: AVR2.13 12.11,34.4
D20
  Top 0.203: AVR2.12 11.46,35.4 IC2.12
D21
  Top 0.203: AVR2.32 8.91,42.94 IC2.32
  Top 0.254: AVR2.32 8.85,43.77 7.76,43.77 6.75,44.79 6.75,45.3 JP65.P$1
D22  (via drill 0.51)
  Top 0.203: AVR2.1 8.31,42.34 IC2.1
  Top 0.254: AVR2.1 7.11,42.34 7.11,42.9 v6.75,43.26
  Bottom 0.254: v6.75,43.26 6.75,43.77 5.73,44.79 JP63.P$1
D23
  Top 0.203: IC2.2 8.84,40.79 8.09,41.54 AVR2.2 6.44,41.54 6.24,41.74
  Top 0.254: 6.24,41.74 5.73,42.25 5.73,42.76 5.22,43.26 JP64.P$1
D24
  Top 0.203: AVR2.9 8.91,36.14 IC2.9
D25
  Top 0.203: AVR2.10 9.71,35.92 10.46,36.67 IC2.10
D26
  Top 0.203: AVR2.11 10.51,36 10.96,36.45 IC2.11
D27
  Top 0.203: IC2.14 12.46,36.63 12.91,36.18 AVR2.14 12.91,32.66 11.32,31.07 10.94,31.07 NRF2.4
D28
  Top 0.203: IC3.13 36.96,35.4 AVR3.13 37.11,33.84 37.21,33.74 37.21,32.85 36.57,32.22 34.92,32.22 34.29,31.58 34.29,30.06 35.81,28.53 35.81,28.41 NRF3.3
  Top 0.254: AVR3.13 37.11,34.4
D29
  Top 0.203: AVR3.12 36.46,35.4 IC3.12
D30
  Top 0.203: AVR3.32 33.91,42.94 IC3.32
  Top 0.254: AVR3.32 33.85,43.77 32.76,43.77 31.75,44.79 31.75,45.3 JP90.P$1
D31  (via drill 0.51)
  Top 0.203: AVR3.1 33.31,42.34 IC3.1
  Top 0.254: AVR3.1 32.11,42.34 32.11,42.9 v31.75,43.26
  Bottom 0.254: v31.75,43.26 31.75,43.77 30.73,44.79 JP88.P$1
D32
  Top 0.203: IC3.2 33.84,40.79 33.09,41.54 AVR3.2 31.44,41.54 31.24,41.74
  Top 0.254: 31.24,41.74 30.73,42.25 30.73,42.76 30.22,43.26 JP89.P$1
D33
  Top 0.203: AVR3.9 33.91,36.14 IC3.9
D34
  Top 0.203: AVR3.10 34.71,35.92 35.46,36.67 IC3.10
D35
  Top 0.203: AVR3.11 35.51,36 35.96,36.45 IC3.11
D36
  Top 0.203: IC3.14 37.46,36.63 37.91,36.18 AVR3.14 37.91,32.66 36.32,31.07 35.94,31.07 NRF3.4
GND  (via drill 0.51)
  Top 0.203: AVR.5 7.57,14.29 IC5.5 10.96,14.29 11.46,14.79 | AVR.3 8.18,15.74 8.62,15.29 IC5.3 10.96,15.29 10.99,15.26 11.46,14.79 | 11.46,14.79 IC5.21 15.85,14.79 AVR.21 | v4.72,12.68 JP7.P$1
  Top 0.254: 10.99,15.26 10.81,15.44 | AVR.21 17.14,14.94 17.92,15.72 v17.92,17.76
  Top 0.305: 5.91,7.27 5.99,7.34 7.76,7.34 8.78,8.36 v8.91,8.48
  Top 0.406: JP12.P$1 7.38,2.52 NRF24.1 | LDO1.1 19.64,9.06 MPU6050.1 | Q1.2 5.91,7.27 v5.73,7.09 | v10.69,15.55 10.81,15.44
  Top 0.61: v11.19,8.23 10.81,8.61 9.03,8.61 8.78,8.36
  Bottom 0.254: JP22.P$1 18.69,19.03 17.92,18.26 v17.92,17.76
  Bottom 0.305: JP22.P$1 19.7,19.03 20.46,18.26 | v8.91,8.48 10.69,10.27 v10.69,15.55
  Bottom 0.381: C3.1 19.18,9.49 MPU6050.1
  Bottom 0.406: C10.2 7.27,3.9 NRF24.1 | 19.28,4.38 JP23.P$1 19.45,8.99 MPU6050.1 | 19.54,9.08 MPU6050.1 | C5.2 19.41,9.29 MPU6050.1 | MPU6050.1 19.45,9.12 18.43,8.1 17.76,8.1 C2.2
  other vias: 11.71,14.54 12.73,13.52
  pour Bottom (isolate 0.305): 3.7,1.5 3.7,21.5 21.2,21.5 21.2,1.5
GND1  (via drill 0.51)
  Top 0.203: AVR1.5 32.57,14.29 IC1.5 35.96,14.29 36.46,14.79 | AVR1.3 33.17,15.74 33.62,15.29 IC1.3 35.96,15.29 35.99,15.26 36.46,14.79 | 36.46,14.79 IC1.21 40.85,14.79 AVR1.21 | v29.72,12.68 JP31.P$1
  Top 0.254: 35.99,15.26 35.81,15.44 | AVR1.21 42.14,14.94 42.92,15.72 v42.92,17.76
  Top 0.305: 30.91,7.27 30.99,7.34 32.76,7.34 33.78,8.36 v33.91,8.48
  Top 0.406: JP37.P$1 32.38,2.52 NRF1.1 | LDO2.1 44.64,9.06 MPU1.1 | Q2.2 30.91,7.27 v30.73,7.09 | v35.69,15.55 35.81,15.44
  Top 0.61: v36.19,8.23 35.81,8.61 34.03,8.61 33.78,8.36
  Bottom 0.254: JP47.P$1 43.69,19.03 42.92,18.26 v42.92,17.76
  Bottom 0.305: JP47.P$1 44.7,19.03 45.46,18.26 | v33.91,8.48 35.69,10.27 v35.69,15.55
  Bottom 0.381: C6.1 44.18,9.49 MPU1.1
  Bottom 0.406: C4.2 32.27,3.9 NRF1.1 | 44.28,4.38 JP48.P$1 44.45,8.99 MPU1.1 | 44.54,9.08 MPU1.1 | C9.2 44.41,9.29 MPU1.1 | MPU1.1 44.45,9.12 43.43,8.1 42.76,8.1 C8.2
  other vias: 36.71,14.54 37.73,13.52
  pour Bottom (isolate 0.305): 28.7,1.5 28.7,21.5 46.2,21.5 46.2,1.5
GND2  (via drill 0.51)
  Top 0.203: AVR2.5 7.57,39.29 IC2.5 10.96,39.29 11.46,39.79 | AVR2.3 8.18,40.74 8.62,40.29 IC2.3 10.96,40.29 10.99,40.26 11.46,39.79 | 11.46,39.79 IC2.21 15.85,39.79 AVR2.21 | v4.72,37.68 JP56.P$1
  Top 0.254: 10.99,40.26 10.81,40.44 | AVR2.21 17.14,39.94 17.92,40.72 v17.92,42.76
  Top 0.305: 5.91,32.27 5.99,32.34 7.76,32.34 8.78,33.36 v8.91,33.48
  Top 0.406: JP62.P$1 7.38,27.52 NRF2.1 | LDO3.1 19.64,34.06 MPU2.1 | Q3.2 5.91,32.27 v5.73,32.09 | v10.69,40.55 10.81,40.44
  Top 0.61: v11.19,33.23 10.81,33.61 9.03,33.61 8.78,33.36
  Bottom 0.254: JP72.P$1 18.69,44.03 17.92,43.26 v17.92,42.76
  Bottom 0.305: JP72.P$1 19.7,44.03 20.46,43.26 | v8.91,33.48 10.69,35.27 v10.69,40.55
  Bottom 0.381: C12.1 19.18,34.49 MPU2.1
  Bottom 0.406: C11.2 7.27,28.9 NRF2.1 | 19.28,29.38 JP73.P$1 19.45,33.99 MPU2.1 | 19.54,34.08 MPU2.1 | C15.2 19.41,34.29 MPU2.1 | MPU2.1 19.45,34.12 18.43,33.1 17.76,33.1 C14.2
  other vias: 11.71,39.54 12.73,38.52
  pour Bottom (isolate 0.305): 3.7,26.5 3.7,46.5 21.2,46.5 21.2,26.5
GND3  (via drill 0.51)
  Top 0.203: AVR3.5 32.57,39.29 IC3.5 35.96,39.29 36.46,39.79 | AVR3.3 33.17,40.74 33.62,40.29 IC3.3 35.96,40.29 35.99,40.26 36.46,39.79 | 36.46,39.79 IC3.21 40.85,39.79 AVR3.21 | v29.72,37.68 JP81.P$1
  Top 0.254: 35.99,40.26 35.81,40.44 | AVR3.21 42.14,39.94 42.92,40.72 v42.92,42.76
  Top 0.305: 30.91,32.27 30.99,32.34 32.76,32.34 33.78,33.36 v33.91,33.48
  Top 0.406: JP87.P$1 32.38,27.52 NRF3.1 | LDO4.1 44.64,34.06 MPU3.1 | Q4.2 30.91,32.27 v30.73,32.09 | v35.69,40.55 35.81,40.44
  Top 0.61: v36.19,33.23 35.81,33.61 34.03,33.61 33.78,33.36
  Bottom 0.254: JP97.P$1 43.69,44.03 42.92,43.26 v42.92,42.76
  Bottom 0.305: JP97.P$1 44.7,44.03 45.46,43.26 | v33.91,33.48 35.69,35.27 v35.69,40.55
  Bottom 0.381: C17.1 44.18,34.49 MPU3.1
  Bottom 0.406: C16.2 32.27,28.9 NRF3.1 | 44.28,29.38 JP98.P$1 44.45,33.99 MPU3.1 | 44.54,34.08 MPU3.1 | C20.2 44.41,34.29 MPU3.1 | MPU3.1 44.45,34.12 43.43,33.1 42.76,33.1 C19.2
  other vias: 36.71,39.54 37.73,38.52
  pour Bottom (isolate 0.305): 28.7,26.5 28.7,46.5 46.2,46.5 46.2,26.5
MISO
  Top 0.203: AVR.16 14.51,11.14 IC5.16 | 14.53,10.23 14.37,10.07 14.37,4.55 15.64,3.28 NRF24.7
  Top 0.254: AVR.16 14.53,10.23
MISO1
  Top 0.203: AVR1.16 39.51,11.14 IC1.16 | 39.53,10.23 39.37,10.07 39.37,4.55 40.64,3.28 NRF1.7
  Top 0.254: AVR1.16 39.53,10.23
MISO2
  Top 0.203: AVR2.16 14.51,36.14 IC2.16 | 14.53,35.23 14.37,35.07 14.37,29.55 15.64,28.28 NRF2.7
  Top 0.254: AVR2.16 14.53,35.23
MISO3
  Top 0.203: AVR3.16 39.51,36.14 IC3.16 | 39.53,35.23 39.37,35.07 39.37,29.55 40.64,28.28 NRF3.7
  Top 0.254: AVR3.16 39.53,35.23
MOSI
  Top 0.203: IC5.15 12.96,11.85 13.71,11.1 AVR.15 13.71,7.45 13.1,6.83 NRF24.6
MOSI1
  Top 0.203: IC1.15 37.96,11.85 38.71,11.1 AVR1.15 38.71,7.45 38.1,6.83 NRF1.6
MOSI2
  Top 0.203: IC2.15 12.96,36.85 13.71,36.1 AVR2.15 13.71,32.45 13.1,31.83 NRF2.6
MOSI3
  Top 0.203: IC3.15 37.96,36.85 38.71,36.1 AVR3.15 38.71,32.45 38.1,31.83 NRF3.6
N$1
  Top 0.203: IC5.8 9.24,12.79 8.19,11.74 AVR.8 7.62,11.54 7.11,11.03 Q1.1
N$2
  Top 0.203: IC5.7 8.88,13.29 8.13,12.54 AVR.7 6.61,12.54 6.24,12.17 6.24,11.15 5.73,10.64 5.22,10.64 4.72,10.14 Q1.3
N$3
  Top 0.203: IC1.8 34.24,12.79 33.19,11.74 AVR1.8 32.62,11.54 32.11,11.03 Q2.1
N$4
  Top 0.203: IC1.7 33.88,13.29 33.13,12.54 AVR1.7 31.61,12.54 31.24,12.17 31.24,11.15 30.73,10.64 30.22,10.64 29.72,10.14 Q2.3
N$5
  Top 0.203: IC2.8 9.24,37.79 8.19,36.74 AVR2.8 7.62,36.54 7.11,36.03 Q3.1
N$6
  Top 0.203: IC2.7 8.88,38.29 8.13,37.54 AVR2.7 6.61,37.54 6.24,37.17 6.24,36.15 5.73,35.64 5.22,35.64 4.72,35.14 Q3.3
N$7
  Top 0.203: IC3.8 34.24,37.79 33.19,36.74 AVR3.8 32.62,36.54 32.11,36.03 Q4.1
N$8
  Top 0.203: IC3.7 33.88,38.29 33.13,37.54 AVR3.7 31.61,37.54 31.24,37.17 31.24,36.15 30.73,35.64 30.22,35.64 29.72,35.14 Q4.3
RESET  (via drill 0.41)
  Top 0.203: IC5.29 11.46,18.68 AVR.29 11.31,19.78 11.83,20.3 v11.83,20.8 JP25.P$1
  Bottom 0.254: R2.1 11.8,20.78 v11.83,20.8
  Bottom 0.406: JP25.P$1 v11.83,20.8
RESET1  (via drill 0.41)
  Top 0.203: IC1.29 36.46,18.68 AVR1.29 36.31,19.78 36.83,20.3 v36.83,20.8 JP50.P$1
  Bottom 0.254: R1.1 36.8,20.78 v36.83,20.8
  Bottom 0.406: JP50.P$1 v36.83,20.8
RESET2  (via drill 0.41)
  Top 0.203: IC2.29 11.46,43.68 AVR2.29 11.31,44.78 11.83,45.3 v11.83,45.8 JP75.P$1
  Bottom 0.254: R3.1 11.8,45.78 v11.83,45.8
  Bottom 0.406: JP75.P$1 v11.83,45.8
RESET3  (via drill 0.41)
  Top 0.203: IC3.29 36.46,43.68 AVR3.29 36.31,44.78 36.83,45.3 v36.83,45.8 JP100.P$1
  Bottom 0.254: R4.1 36.8,45.78 v36.83,45.8
  Bottom 0.406: JP100.P$1 v36.83,45.8
RXI  (1 unrouted)
  Top 0.203: 10.99,16.92 10.99,17.41 10.51,17.89 AVR.30
  Top 0.254: AVR.30 10.51,21.11 10.3,21.31 JP2.P$1
RXI1  (1 unrouted)
  Top 0.203: 35.99,16.92 35.99,17.41 35.51,17.89 AVR1.30
  Top 0.254: AVR1.30 35.51,21.11 35.3,21.31 JP27.P$1
RXI2  (1 unrouted)
  Top 0.203: 10.99,41.92 10.99,42.41 10.51,42.89 AVR2.30
  Top 0.254: AVR2.30 10.51,46.11 10.3,46.31 JP52.P$1
RXI3  (1 unrouted)
  Top 0.203: 35.99,41.92 35.99,42.41 35.51,42.89 AVR3.30
  Top 0.254: AVR3.30 35.51,46.11 35.3,46.31 JP77.P$1
SCK  (via drill 0.41)
  Top 0.203: IC5.17 15.11,11.74 AVR.17 16,10.75 15.38,10.14 v15.38,7.85
  Bottom 0.203: v15.38,7.85 15.38,7.6 14.37,6.58 14.37,4.42 NRF24.5
SCK1  (via drill 0.41)
  Top 0.203: IC1.17 40.11,11.74 AVR1.17 41,10.75 40.38,10.14 v40.38,7.85
  Bottom 0.203: v40.38,7.85 40.38,7.6 39.37,6.58 39.37,4.42 NRF1.5
SCK2  (via drill 0.41)
  Top 0.203: IC2.17 15.11,36.74 AVR2.17 16,35.75 15.38,35.14 v15.38,32.85
  Bottom 0.203: v15.38,32.85 15.38,32.6 14.37,31.58 14.37,29.42 NRF2.5
SCK3  (via drill 0.41)
  Top 0.203: IC3.17 40.11,36.74 AVR3.17 41,35.75 40.38,35.14 v40.38,32.85
  Bottom 0.203: v40.38,32.85 40.38,32.6 39.37,31.58 39.37,29.42 NRF3.5
TXO
  Top 0.203: 8.27,20.3 8.78,19.79 9.54,19.79 9.71,19.62 AVR.31 9.8,17.88 10.46,17.22 IC5.31
  Top 0.254: 8.27,20.3 8.27,20.8 JP4.P$1
TXO1
  Top 0.203: 33.27,20.3 33.78,19.79 34.54,19.79 34.71,19.62 AVR1.31 34.8,17.88 35.46,17.22 IC1.31
  Top 0.254: 33.27,20.3 33.27,20.8 JP28.P$1
TXO2
  Top 0.203: 8.27,45.3 8.78,44.79 9.54,44.79 9.71,44.62 AVR2.31 9.8,42.88 10.46,42.22 IC2.31
  Top 0.254: 8.27,45.3 8.27,45.8 JP53.P$1
TXO3
  Top 0.203: 33.27,45.3 33.78,44.79 34.54,44.79 34.71,44.62 AVR3.31 34.8,42.88 35.46,42.22 IC3.31
  Top 0.254: 33.27,45.3 33.27,45.8 JP78.P$1
VBAT  (via drill 0.51)
  Top 0.406: LDO1.3 18.69,2.77 18.43,2.52 | JP24.P$1 18.43,2.52 | 18.43,2.52 v17.67,2.52
  Bottom 0.406: C2.1 v17.67,2.52 JP24.P$1
VBAT1  (via drill 0.51)
  Top 0.406: LDO2.3 43.69,2.77 43.43,2.52 | JP49.P$1 43.43,2.52 | 43.43,2.52 v42.67,2.52
  Bottom 0.406: C8.1 v42.67,2.52 JP49.P$1
VBAT2  (via drill 0.51)
  Top 0.406: LDO3.3 18.69,27.77 18.43,27.52 | JP74.P$1 18.43,27.52 | 18.43,27.52 v17.67,27.52
  Bottom 0.406: C14.1 v17.67,27.52 JP74.P$1
VBAT3  (via drill 0.51)
  Top 0.406: LDO4.3 43.69,27.77 43.43,27.52 | JP99.P$1 43.43,27.52 | 43.43,27.52 v42.67,27.52
  Bottom 0.406: C19.1 v42.67,27.52 JP99.P$1

## Text on the board
tPlace: D2 | TX | RX | RST | A3 | A2 | A1 | D2 | TX | RX | RST | A3 | A2 | A1 | A0 | A0 | D4 | D4 | 3V3 | 3V3 | kane | kane | shure open technologies | shure | 3V3 | 3V3 | + | + | shure open technologies / open source hardware | D2 | TX | RX | RST | A3 | A2 | A1 | D2 | TX | RX | RST | A3 | A2 | A1 | shure open technologies | A0 | A0 | D4 | D4 | 3V3 | 3V3 | avoccado | avoccado | kane | kane | NRF24 | NRF24 | 3V3 | 3V3 | + | + | avoccado-avr-kane / etemu.com
bPlace: D3 | D3 | RST | RST | BAT | BAT | + | + | D3 | D3 | RST | RST | BAT | BAT | + | +